# Altium PCB H1N1.PcbDoc
Units mm, origin at the board's own origin, x right, y up, seen from the top; angles counter-clockwise.
Board outline 60.07 x 33.02 mm, 2 copper layers (Top Layer, Bottom Layer); 36 components, 21 nets, 92 pads, 10 vias.
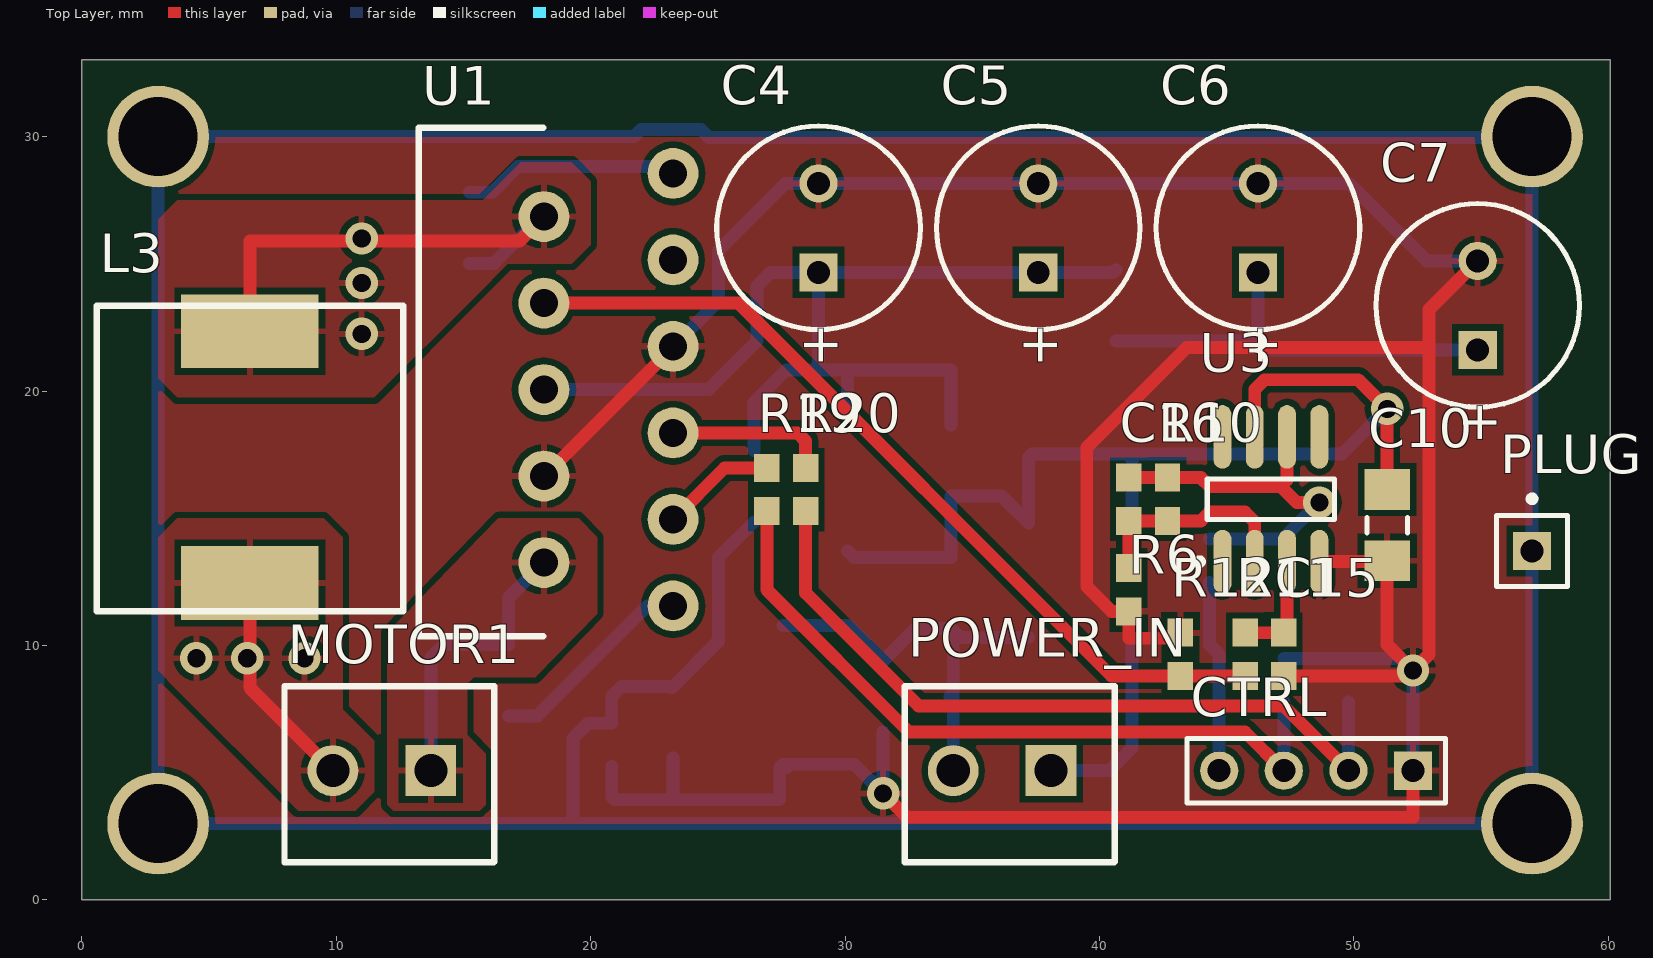
[diagram p0: Top Layer view]
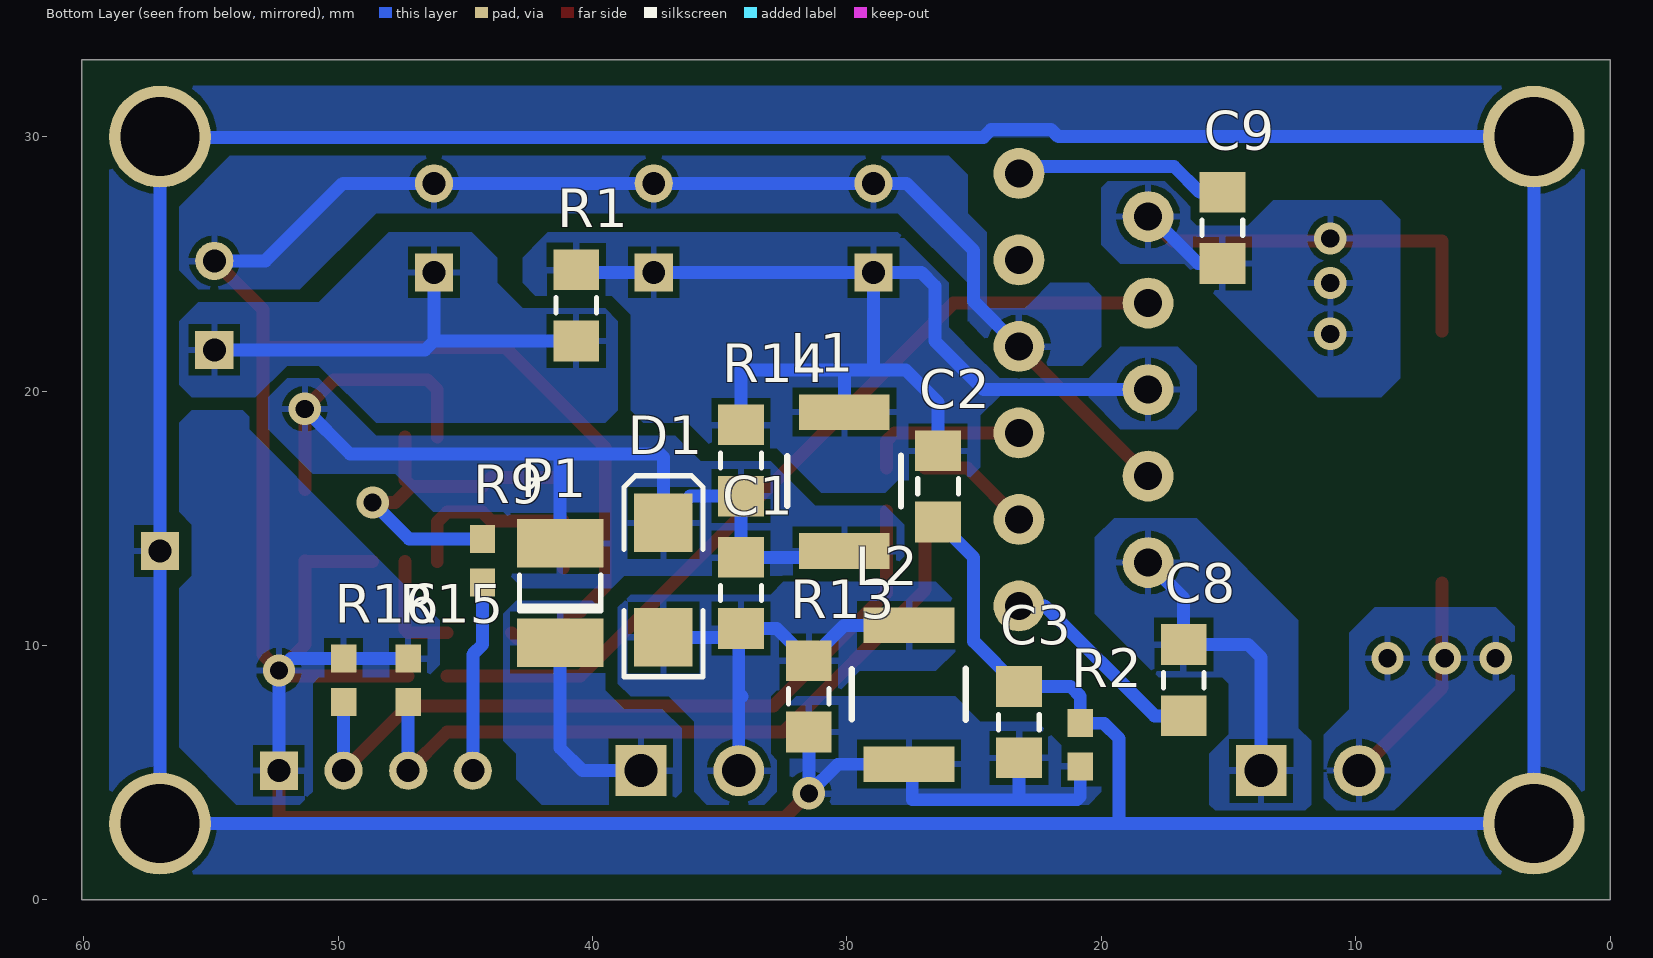
[diagram p1: Bottom Layer view, seen from below]

## Layer stack, top to bottom
Top Layer: signal copper 0.0356
Dielectric: dielectric 0.32, FR-4, Dk 4.8
Bottom Layer: signal copper 0.0356

## Board outline
0,0 0,33.02 60.071,33.02 60.071,0

## Design rules (kind name [scope] priority, off if disabled: settings)
Clearance [All] p1: gap=0.254
HoleSize [All] p1: absolutevalues=TRUE maxlimit=5 minlimit=0.025 maxpercent=80.000 minpercent=20.000
PolygonConnect [All] p1: connectstyle=Relief reliefconductorwidth=0.254 reliefentries=4 polygonreliefangle="90 Angle"
RoomDefinition H1N1 [InComponentClass('H1N1')] p1: confinementstyle=ConfineIn formatcopy=TRUE lockcomponents=FALSE outline -1.778,-1.143 64.643,-1.143 64.643,35.941 -1.778,35.941
RoutingVias [All] p1: holewidth=0.35 width=1 viastyle="Through Hole" minholewidth=0.3 minwidth=0.9 maxholewidth=5 maxwidth=5
SolderMaskExpansion [All] p1: expansion=0.102
TestPointUsage [All] p1: valid=0 allowmultiple=FALSE
Testpoint [All] p1: side=15 testpointundercomponent=TRUE minsize=1.016 maxsize=2.54 preferedsize=1.524 minholesize=0 maxholesize=1.016 preferedholesize=0.813 testpointgrid=0.025 style=1021 order=0123456789
Width [All] p1: maxlimit=1.016 minlimit=0.508 preferedwidth=0.508
18 further rules are at their usual default settings.

## Components (designator, comment, footprint, x,y, rotation, side; value= is the part's Value field where it differs from the comment)
C1 "Cap 100n X7R 1206 100V" 3216[1206] 34.163,12.065 r90 bottom
C2 "Cap 100n X7R 1206 100V" 3216[1206] 26.416,16.256 r90 bottom
C3 "Cap 100n X7R 1206 100V" 3216[1206] 23.241,6.985 r90 bottom
C4 "Cap 220u Alu 3.5x8x11.5 35V" CAPPR3.5-8X11.5 28.956,26.416 r90 top
C5 "Cap 220u Alu 3.5x8x11.5 35V" CAPPR3.5-8X11.5 37.592,26.416 r90 top
C6 "Cap 220u Alu 3.5x8x11.5 35V" CAPPR3.5-8X11.5 46.228,26.416 r90 top
C7 "Cap 220u Alu 3.5x8x11.5 35V" CAPPR3.5-8X11.5 54.864,23.368 r90 top
C8 "Cap 100n X7R 1206 100V" 3216[1206] 16.764,8.636 r90 bottom
C9 "Cap 100n X7R 1206 100V" 3216[1206] 15.24,26.416 r270 bottom
C10 "Cap 100n X7R 1206 100V" 3216[1206] 51.308,14.732 r90 top
C15 "Cap 10p X7R 0603 25V" 1608[0603] 47.244,9.652 r90 top
C16 "Cap 100p X7R 0603 25V" 1608[0603] 41.148,15.748 r270 top
CTRL "Header 4" HDR1X4 52.324,5.08 r180 top
D1 "1SMB24AT3G" SMB 37.211,12.573 r90 bottom
L1 "Wurth 7445101" 7445101 30.099,13.716 r0 bottom
L2 "Wurth 7445101" 7445101 27.559,5.334 r0 bottom
L3 "Wurth 74477020" 74477020 6.604,22.352 r0 top
MOTOR1 "Header 2" "Bornier 3.85" 13.716,5.08 r180 top
P1 "Polyswitch MINISMDC110F/24" 1812 41.275,12.065 r90 bottom
PLUG "Masse mécanique" PIN1 57,13.716 r0 top
POWER_IN "Header 2" "Bornier 3.85" 38.1,5.08 r180 top
R1 "Res 47m 1206" 3216[1206] 40.64,23.368 r90 bottom
R2 "Res 0 0603" 1608[0603] 20.828,6.096 r90 bottom
R6 "Res 100 0603" 1608[0603] 41.148,12.192 r270 top
R9 "Res 100 0603" 1608[0603] 44.323,13.335 r90 bottom
R10 "Res 100 0603" 1608[0603] 42.672,15.748 r270 top
R11 "Res 100k 0603" 1608[0603] 45.72,9.652 r90 top
R12 "Res 2.7k 0603" 1608[0603] 43.18,9.652 r270 top
R13 "Res 3.3k 1206" 3216[1206] 31.496,8.004 r270 bottom
R14 "Res 3.3k 1206" 3216[1206] 34.163,17.272 r90 bottom
R15 "Res 10k 0603" 1608[0603] 47.244,8.636 r270 bottom
R16 "Res 10k 0603" 1608[0603] 49.784,8.636 r270 bottom
R19 "Res 100 0603" 1608[0603] 26.924,16.129 r90 top
R20 "Res 100 0603" 1608[0603] 28.448,16.129 r90 top
U1 "LMD18200" LMD18200 23.241,11.557 r90 top
U3 "LM7301IM" M08A_M 46.736,15.748 r90 top

## Footprints (in the part's own frame and the unit in brackets; to place one, negate y for a bottom-side part, rotate by r counter-clockwise, add the part's x,y. Pads: shape width x height; smd on the part's side, far side on the other; paste and mask are expansions set on the pad)
1608[0603] [mm] "Chip Capacitor; Body 1.6 x 0.8 mm (LxW typ)"
  rect 1.1x1 smd: 1(-0.85,0) 2(0.85,0)
1812 [mm] "Chip Capacitor; Body 4.5 x 3.2 mm (LxW typ)"
  rect 1.9x3.4 smd: 1(-1.95,0) 2(1.95,0)
  silkscreen extent -0.7,-1.6 0.7,1.6
3216[1206] [mm] "Chip Resistor; Body 3.2 x 1.6 mm (LxW typ)"
  rect 1.6x1.8 smd: 1(-1.4,0) 2(1.4,0)
  silkscreen extent -0.3,-0.8 0.3,0.8
7445101 [mm] "Wurth Inductor 7445101"
  rect 3.56x1.4 smd: 1(0,0) 2(0,-5.46)
  silkscreen extent -2.22,-3.75 2.25,-1.75
74477020 [mm] "Wurth Inductor"
  rect 5.4x2.9 smd: 1(0,0) 2(0,-9.9)
  silkscreen extent -6.02,-11 6.02,1
"Bornier 3.85" [mm]
  rect 2x2 hole 1.3: 1(0,0)
  round 2 hole 1.3: 2(3.85,0)
  silkscreen extent -2.5,-3.32 5.75,3.6
CAPPR3.5-8X11.5 [mm] "Capacitor, Electrolytic, Radial; Body 8 x 11.5 mm (Dia.xH typ); Pin Spacing 3.5 mm (typ)"
  rect 1.5x1.5 hole 0.9: 1(-1.75,0)
  round 1.5 hole 0.9: 2(1.75,0)
  silkscreen extent -4,-4 4,4
HDR1X4 [mm] "Connector; Header; 4 Position"
  rect 1.5x1.5 hole 0.9: 1(0,0)
  round 1.5 hole 0.9: 2(2.54,0) 3(5.08,0) 4(7.62,0)
  silkscreen extent -1.27,-1.27 8.89,1.27
LMD18200 [mm] "11 Lead TO220"
  round 2 hole 1.1: 1(0,0) 2(1.7,5.08) 3(3.4,0) 4(5.1,5.08) 5(6.8,0) 6(8.5,5.08) 7(10.2,0) 8(11.9,5.08) 9(13.6,0) 10(15.3,5.08) 11(17,0)
  silkscreen extent -1.2,5.1 18.8,10
M08A_M [mm] "SOIC, 8-Leads, Body 4.9x3.9mm, Pitch 1.27mm, IPC Low Density"
  oval 2.5x0.7 smd: 1(-2.45,1.905) 2(-2.45,0.635) 3(-2.45,-0.635) 4(-2.45,-1.905) 5(2.45,-1.905) 6(2.45,-0.635) 7(2.45,0.635) 8(2.45,1.905)
  silkscreen extent -2.57,-2.5 0.8,2.93, body extent -2,-2.5 2,2.5, height 1.76
PIN1 [mm] "Connector; Plug"
  rect 1.5x1.5 hole 0.9: 1(0,0)
  silkscreen extent -1.4,-1.4 1.4,2.17
SMB [mm] "DO-214-AA/SMB; 2 C-Bend Leads; Body 5.3 x 3.6 mm, inc. leads (LxW)"
  rect 2.3x2.3 smd: 1(-2.25,0) 2(2.25,0)
  silkscreen extent -3.8,-1.55 4.1,1.55

## Part data
C1 C2 C3 C8 C9 C10 C15 C16: library part Cap, "Capacitor"
C4 C5 C6 C7: library part "Cap Pol1", "Polarized Capacitor (Radial)"
CTRL: "Header, 4-Pin"
D1: library part "D Zener", "Zener Diode"
L1 L2: library part "Inductor Iron", "Magnetic-Core Inductor"
L3: library part Inductor, "Inductor"
MOTOR1 POWER_IN: "Header, 2-Pin"
P1: library part "Res Varistor", "Varistor (Voltage-Sensitive Resistor)"
PLUG: library part Plug, "Plug"
R1 R2 R6 R9 R10 R11 R12 R13 R14 R15 R16 R19 R20: library part Res2, "Resistor"
U1: "3A, 55V H-Bridge"
U3: "Low-Power, 4MHZ GBW, Rail-to-Rail Input-Output Operational Amplifier in TinyPak Package"

## Free pads (board coordinates)
  round 4 hole 3.1: 0(3,3) 1(57,3) 2(57,30) 3(3,30)

## Via types
v1: diameter 1.27, hole 0.711, Top Layer to Bottom Layer, 10 vias

## Nets (pads, with @x,y where several pads share a name; then routed paths per layer and width w, separated by ;. In a path a pad name is that pad's centre, name@x,y a point inside that pad or via, vN(x,y) a via of type N, cw(c..) or ccw(c..) an arc to the next point about the centre after c; other vN are vias at no path point)
COURANT: CTRL.4 R9.1 | length 7.6
  Bottom Layer w0.508: R9.1 44.323,10.033 44.704,9.652 CTRL.4
GND: C3.1 C4.2 C5.2 C6.2 C7.2 C10.1 C15.1 CTRL.1 L2.1 R2.1 R6.2 R12.1 R13.2 R15.1 R16.1 U1.4 U1.7 U3.4 | length 149.6
  Top Layer w0.508: U1.4 23.241,21.737 U1.7 ; v1(31.496,4.191) 32.437,3.25 52.324,3.25 CTRL.1 ; R12.1 42.965,10.287 41.148,10.287 R6.2 40.474,11.342 39.497,12.319 39.497,17.78 43.434,21.717 52.959,21.717 ; C15.1 52.109,8.802 v1(52.324,9.017) ; U3.4 51.274,13.298 C10.1 51.308,10.033 v1(52.324,9.017) ; C7.2 52.959,23.213 52.959,21.717 ; v1(52.324,9.017) 52.959,9.652 52.959,21.717
  Bottom Layer w0.508: R2.1 20.828,4.064 20.955,3.937 23.241,3.937 ; C3.1 23.241,3.937 ; U1.7 25.019,23.535 25.019,25.527 27.658,28.166 C4.2 C5.2 C6.2 49.812,28.166 52.86,25.118 C7.2 ; L2.1@27.689,5.204 L2.1 ; R13.2 v1(31.496,4.191) 30.353,5.334 L2.1 ; R15.1 R16.1 51.855,9.486 v1(52.324,9.017) CTRL.1 ; 23.241,3.937 27.432,3.937 27.432,5.207 L2.1
NetC1_1: C1.1 D1.1 L2.2 POWER_IN.2 R13.1 | length 16.6
  Bottom Layer w0.508: L2.2 30.106,10.794 R13.1 32.757,10.665 C1.1 C1.1@34.25,10.578 ; 34.126,8.004 34.25,8.128 ; POWER_IN.2 34.25,8.128 ; D1.1 34.505,10.323 C1.1@34.25,10.578 ; 34.25,8.128 C1.1@34.25,10.578
NetC2_1: C2.1 C3.2 pad.0 pad.1 pad.2 pad.3 PLUG.1 R2.2 | length 181.4
  Top Layer w0.508: pad.2@56.972,29.972 pad.2 ; pad.1@57.023,3.117 pad.1@57.127,3.013
  Bottom Layer w0.508: pad.3@3,30.734 pad.3 ; C3.2@23.199,8.343 C3.2 ; C2.1 25.019,13.459 25.019,10.163 C3.2 ; pad.2@56.266,30.734 pad.2 ; pad.1@57.404,3.404 pad.1 ; pad.3 pad.0 18.669,3 19.304,3 ; pad.3 21.689,30 21.971,30.282 24.328,30.282 24.638,29.972 56.972,29.972 pad.2 ; 19.304,3 pad.1 ; 19.304,3 19.304,6.35 19.9,6.946 R2.2 20.828,8.001 21.212,8.385 C3.2 ; pad.1 PLUG.1 pad.2
NetC2_2: C2.2 C4.1 C5.1 L1.2 R1.2 R14.2 U1.6 | length 43.5
  Bottom Layer w0.508: U1.6 24.629,20.057 26.543,21.971 26.543,24.13 27.079,24.666 C4.1 ; C2.2 26.416,19.558 27.686,20.828 28.956,20.828 ; L1.2 30.099,20.828 ; R14.2 34.163,20.828 30.099,20.828 ; R1.2 40.538,24.666 C5.1 C4.1 ; 28.956,20.828 30.099,20.828 ; 28.956,20.828 C4.1
NetC6_1: C6.1 C7.1 R1.1 | length 17.1
  Bottom Layer w0.508: R1.1 46.225,21.968 46.228,21.971 ; C6.1 46.228,21.971 ; C7.1 46.581,21.618 46.228,21.971
NetC8_1: C8.1 U1.1 | length 8.3
  Bottom Layer w0.508: C8.1 17.904,7.236 22.225,11.557 U1.1
NetC8_2: C8.2 MOTOR1.1 U1.2 | length 11.5
  Bottom Layer w0.508: MOTOR1.1 13.716,9.525 14.227,10.036 C8.2 16.764,11.86 U1.2
NetC9_1: C9.1 U1.11 | length 8.5
  Bottom Layer w0.508: C9.1 16.132,27.816 17.145,28.829 22.969,28.829 U1.11
NetC9_2: C9.2 L3.1 U1.10 | length 19.8
  Top Layer w0.508: L3.1 6.604,25.908 17.212,25.908 U1.10
  Bottom Layer w0.508: C9.2 16.192,25.016 18.097,26.921 U1.10 U1.10@18.161,26.289
  other v1: 11,22.25 11,24.25 11,26
NetC15_2: C15.2 R11.2 U3.3 | length 4.4
  Top Layer w0.508: R11.2 C15.2 47.371,10.629 U3.3
NetC16_1: C16.1 R9.2 R10.1 U3.6 | length 14.9
  Top Layer w0.508: C16.1 R10.1 43.981,16.598 44.323,16.256 47.117,16.256 ; U3.6 47.371,16.51 47.117,16.256 ; v1(48.641,15.621) 47.752,15.621 47.117,16.256
  Bottom Layer w0.508: R9.2 47.205,14.185 v1(48.641,15.621)
NetC16_2: C16.2 R6.1 R10.2 U3.2 | length 8.7
  Top Layer w0.508: R6.1 C16.2 R10.2 43.981,14.898 44.323,15.24 45.72,15.24 46.101,14.859 U3.2
NetL3_2: L3.2 MOTOR1.2 | length 8.7
  Top Layer w0.508: L3.2 6.604,8.342 MOTOR1.2
  other v1: 4.5,9.5 6.5,9.5 8.75,9.5
NetP1_1: P1.1 POWER_IN.1 | length 7.7
  Bottom Layer w0.508: POWER_IN.1 40.386,5.08 41.275,5.969 P1.1
NetR11_1: R11.1 R12.2 U1.8 | length 33.6
  Top Layer w0.508: U1.8 25.819,23.457 40.474,8.802 R12.2 R11.1
NetR19_2: R19.2 U1.3 | length 4.5
  Top Layer w0.508: U1.3 25.263,16.979 R19.2
NetR20_2: R20.2 U1.5 | length 6.4
  Top Layer w0.508: U1.5 28.125,18.357 28.448,18.034 R20.2
PWM: CTRL.2 R16.2 R20.1 | length 30.1
  Top Layer w0.508: R20.1 28.448,12.065 32.893,7.62 47.244,7.62 CTRL.2
  Bottom Layer w0.508: CTRL.2 R16.2
SENS: CTRL.3 R15.2 R19.1 | length 29.1
  Top Layer w0.508: R19.1 26.924,12.192 32.512,6.604 45.72,6.604 CTRL.3
  Bottom Layer w0.508: CTRL.3 R15.2
VCC: C1.2 C10.2 D1.2 L1.1 P1.2 R14.1 U3.7 | length 41.9
  Top Layer w0.508: U3.7 46.101,20.066 46.482,20.447 50.165,20.447 v1(51.308,19.304) C10.2
  Bottom Layer w0.508: L1.1 30.35,13.465 C1.2 R14.1 36.162,15.872 D1.2 37.211,17.399 37.338,17.526 41.275,17.526 ; P1.2 41.275,17.526 ; v1(51.308,19.304) 49.53,17.526 41.275,17.526
pads on no net: U1.9 U3.1 U3.5 U3.8

## Polygon pours and split planes (outlines as drawn)
GND on Top Layer "Bottom Layer-No Net 1" (solid, remove dead copper): 3,30 3.028,29.972 56.972,29.972 57,29.944 57,3 3,3
NetC8_2 on Top Layer "Bottom Layer-No Net 1" (solid): 16.368,15 19.522,15 20.25,14.25 20.25,11.25 17.824,8.75 15.397,8.75 15.154,8.5 15.154,6.5 15.882,5.75 15.882,3.75 15.64,3.5 12.243,3.5 12,3.75 12,10.25 12,10.5 16.368,15
NetC9_2 on Top Layer "Bottom Layer-No Net 1" (solid): 3.75,19.75 3,20.5 3,26.75 3.75,27.5 15.75,27.5 17.25,29 19.25,29 20,28.25 20,25.75 19.25,25 16.75,25 15.5,23.75 11.5,19.75 3.75,19.75
NetL3_2 on Top Layer "Bottom Layer-No Net 1" (solid): 3,14.25 3.75,15 9.5,15 10.25,14.25 10.25,7.5 11.5,6.25 11.5,4.25 10.75,3.5 8.5,3.5 7.75,4.25 4.25,7.75 3.75,8.25 3,9
NetC2_1 on Bottom Layer "Bottom Layer-No Net 1" (solid, remove dead copper): 57,3 2.873,3 2.873,1.127 3,1 57,1
NetC2_1 on Bottom Layer "Bottom Layer-No Net 1" (solid, remove dead copper): 56.972,29.972 58.972,29.972 59,30 59,3 57,3 57,30.127
NetC2_1 on Bottom Layer "Bottom Layer-No Net 1" (solid, remove dead copper): 3,30 3,32 57,32 57,30 56.972,29.972 3.155,29.972 3.127,30
NetC2_1 on Bottom Layer "Bottom Layer-No Net 1" (solid, remove dead copper): 3,3 3,30 1,30 1,3
NetC9_2 on Bottom Layer "Bottom Layer-No Net 1" (solid): 13,27.5 13.25,27.5 14.25,26.5 16.25,26.5 16.25,24.5 15.12,23.37 14.13,23.37 12.75,24.75 13,25 13,27.5
NetC9_2 on Bottom Layer "Bottom Layer-No Net 1" (solid): 9,27.5 8.25,26.75 8.25,20.75 8.25,20.5 9,19.75 11.5,19.75 15.25,23.5 16.75,25 19.25,25 20,25.75 20,28 19.75,28.25 17.75,28.25 17.5,28.25 16.75,27.5 16.5,27.25 16.5,26.75 16.25,26.5 13.75,26.5 13.75,26.75 13,27.5 9,27.5
NetL3_2 on Bottom Layer "Bottom Layer-No Net 1" (solid): 8.25,3.75 3.75,8.25 3.75,10.75 4.5,11.5 8.5,11.5 9.25,11.5 10.25,10.5 10.25,7.5 11.25,6.5 11.25,4 10.75,3.5 9,3.5 8.5,3.5 8.25,3.75
GND on Bottom Layer "Bottom Layer-No Net 1" (solid): 55.75,19.25 56.25,18.75 56.25,15.25 55.75,14.75 55.75,12.75 56.25,12.25 56.25,6 54,3.75 53.25,3.75 51.5,3.75 51,4.25 51,8.5 50.75,8.75 46.5,8.75 46,9.25 46,11 49.75,14.75 53.5,18.5 53.5,19 53.75,19.25 55.75,19.25
NetC2_2 on Bottom Layer "Bottom Layer-No Net 1" (solid): 41.75,26.25 42.75,25.25 42.75,24.25 42.25,23.75 39.486,23.75 39.486,25.764 39,26.25
NetC2_2 on Bottom Layer "Bottom Layer-No Net 1" (solid): 42,26 41.75,26.25 40.75,26.25 28.5,26.25 28.25,26.25 28,26.25 27.75,26 42,26
GND on Bottom Layer "Bottom Layer-No Net 1" (solid): 25.25,22.75 23.5,21 22,21 20.75,21 20,21.75 20,23.75 20.5,24.25 22,24.25 22.75,23.5 23,23.25 24.5,23.25
GND on Bottom Layer "Bottom Layer-No Net 1" (solid): 55.5,24 56.25,24.75 56.25,27.25 54.25,29.25 52.25,29.25 26,29.25 25.25,28.5 25.25,27 24.5,26.25 24.5,23.75 24.5,23.25 25,22.75 25.25,22.75 25.25,24.25 28,27 48.5,27 51.5,24 55.5,24
GND on Bottom Layer "Bottom Layer-No Net 1" (solid): 20,4.25 20.5,3.75 32,3.75 32.25,4 32.25,7.75 32,8 25.75,8 24.75,7 22.5,7 21.5,6 20.25,6 20,5.75 20,4.25
NetC8_2 on Bottom Layer "Bottom Layer-No Net 1" (solid): 15.75,3.75 15.5,3.5 12.75,3.5 12,3.5 11.75,3.75 11.75,5.207 15.75,5.207
NetC8_2 on Bottom Layer "Bottom Layer-No Net 1" (solid): 12.25,6.75 11.75,6.25 11.75,4.25 11.75,3.75 15.75,3.75 15.75,5.75 14.75,6.75 12.25,6.75
NetC8_2 on Bottom Layer "Bottom Layer-No Net 1" (solid): 17,15 19.5,15 20.25,14.25 20.25,11.25 17.75,8.75 15.25,8.75 15,8.5 15,4 14.75,3.75 12.5,3.75 12.25,4 12.25,11 16.25,15 17,15
NetC2_2 on Bottom Layer "Bottom Layer-No Net 1" (solid): 25.25,21.75 24,20.5 24,20.057 24,19.799 24.75,19.049 25.049,19.049 25.75,19.75 25.25,20.25 25.25,21.75
NetC2_2 on Bottom Layer "Bottom Layer-No Net 1" (solid): 17,21.75 19.25,21.75 20,21 20.5,20.5 24,20.5 24.75,21.25 24.75,19.303 24.75,19.049 24.75,19.057 23.75,20.057 20.5,20.057 20.5,19.75 19.25,18.5 17,18.5 16.25,19.25 16.25,21 17,21.75
NetC2_2 on Bottom Layer "Bottom Layer-No Net 1" (solid): 39.25,23.75 38.5,23 38.5,19.25 38,18.75 36.25,18.75 35.25,17.75 32.75,17.75 31,16 28.5,16 28,16.5 25.25,16.5 24.75,17 24.75,21.25 26,22.5 26,24.25 27.75,26 42,26 42.75,25.25 42.75,24.25 42.25,23.75 39.25,23.75
NetC6_1 on Bottom Layer "Bottom Layer-No Net 1" (solid): 39.5,23.25 39,22.75 39,21 39,19.5 39,19.25 39.5,18.75 48.5,18.75 50.75,21 52,21 53.25,19.75 55.5,19.75 55.75,19.75 56.25,20.25 56.25,22.75 55.5,23.5 50.75,23.5 48,26.25 44.75,26.25 43.75,25.25 43.75,24.25 42.75,23.25 39.5,23.25
NetP1_1 on Bottom Layer "Bottom Layer-No Net 1" (solid): 36.5,4.25 36.5,6.75 37.25,7.5 38.75,7.5 39.5,8.25 39.5,11.25 40,11.75 43,11.75 43.5,11.25 43.5,6.25 43,5.75 43,4.75 42,3.75 37,3.75 36.5,4.25
VCC on Bottom Layer "Bottom Layer-No Net 1" (solid): 28.25,13 27.75,13.5 27.75,14.75 28.25,15.25 28.5,15.5 31.25,15.5 33,17.25 35.75,17.25 36.75,18.25 48.5,18.25 50.5,20.25 50.75,20.5 52,20.5 52.75,19.75 52.75,18.5 52,17.75 51,16.75 48.25,16.75 47.75,16.75 46.25,15.25 43.75,15.25 43.5,15.25 43.25,15 43.25,14.25 43.25,12.75 42.75,12.25 39.25,12.25 38.75,12.75 28.5,12.75 28.25,13
NetC1_1 on Bottom Layer "Bottom Layer-No Net 1" (solid): 33.75,3.75 33.25,3.75 32.75,4.25 32.75,5.5 33,5.75 33,6 33,8 32.75,8.25 30.25,8.25 29.5,9 27.5,9 26.5,9 25.75,9.75 25.75,11.75 26.5,12.5 32.5,12.5 33,12 38.5,12 39,11.5 39,8.5 38.5,8 37,8 36,7 36,4.5 36,4.25 35.5,3.75

## Text inside footprints (layer, text, board x,y; h text height)
C4: Top Overlay "+" at 29.706,20.941 h1.5 r90
C5: Top Overlay "+" at 38.342,20.941 h1.5 r90
C6: Top Overlay "+" at 46.978,20.941 h1.5 r90
C7: Top Overlay "+" at 55.614,17.893 h1.5 r90